# Altium PCB RC.PcbDoc
Units mm, origin at the board's own origin, x right, y up, seen from the top; angles counter-clockwise.
Board outline 106 x 78.9 mm, 4 copper layers (Top Layer, Layer 2, Layer 3, Bottom Layer), stack 0.603 mm thick; 71 components, 62 nets, 320 pads, 0 vias.
Unrouted connection lines stored in the file: 198.
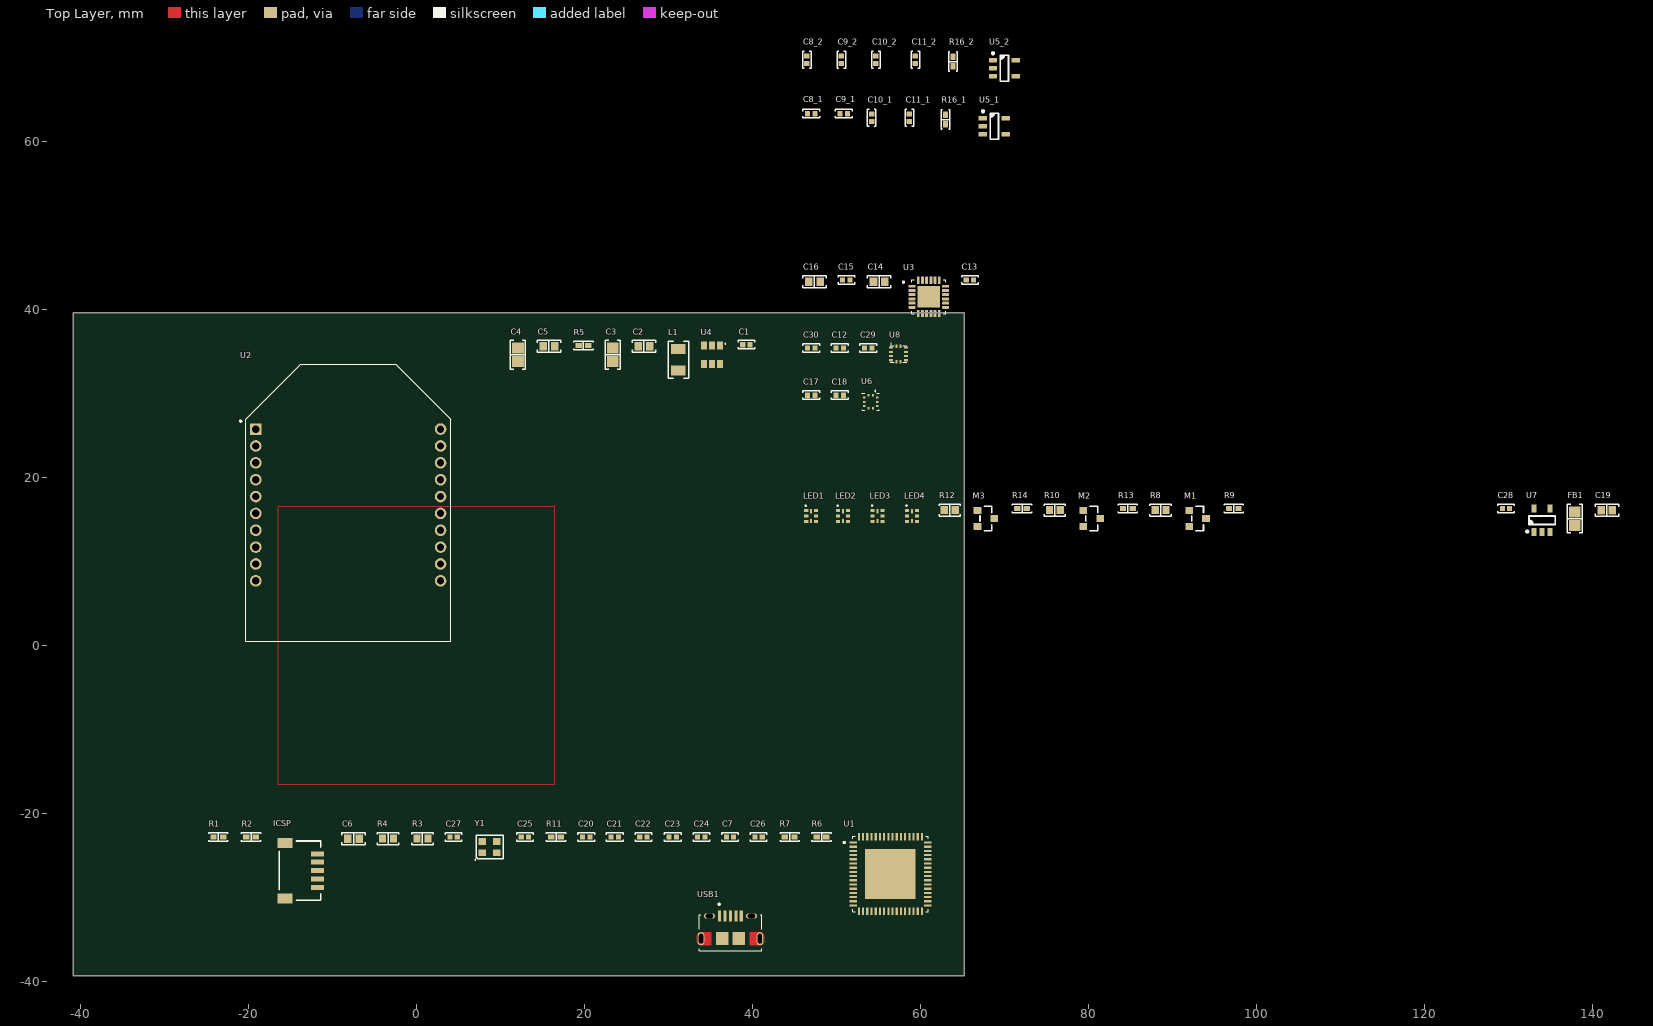
[diagram p0: Top Layer view]
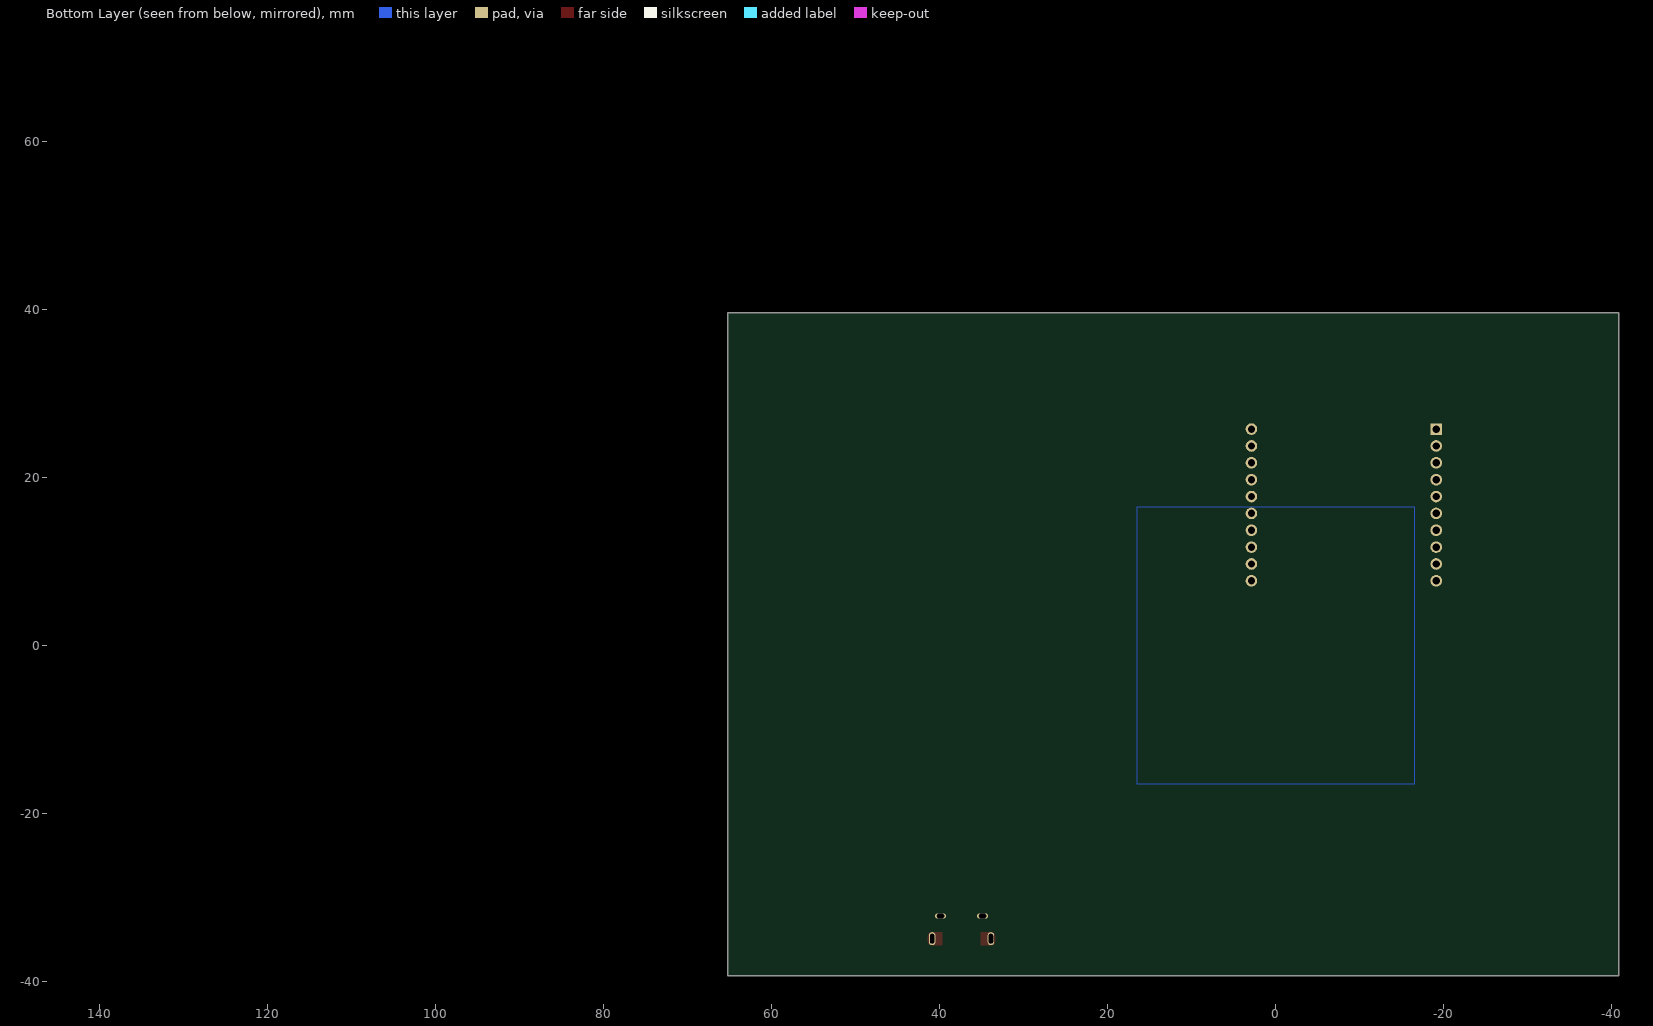
[diagram p1: Bottom Layer view, seen from below]
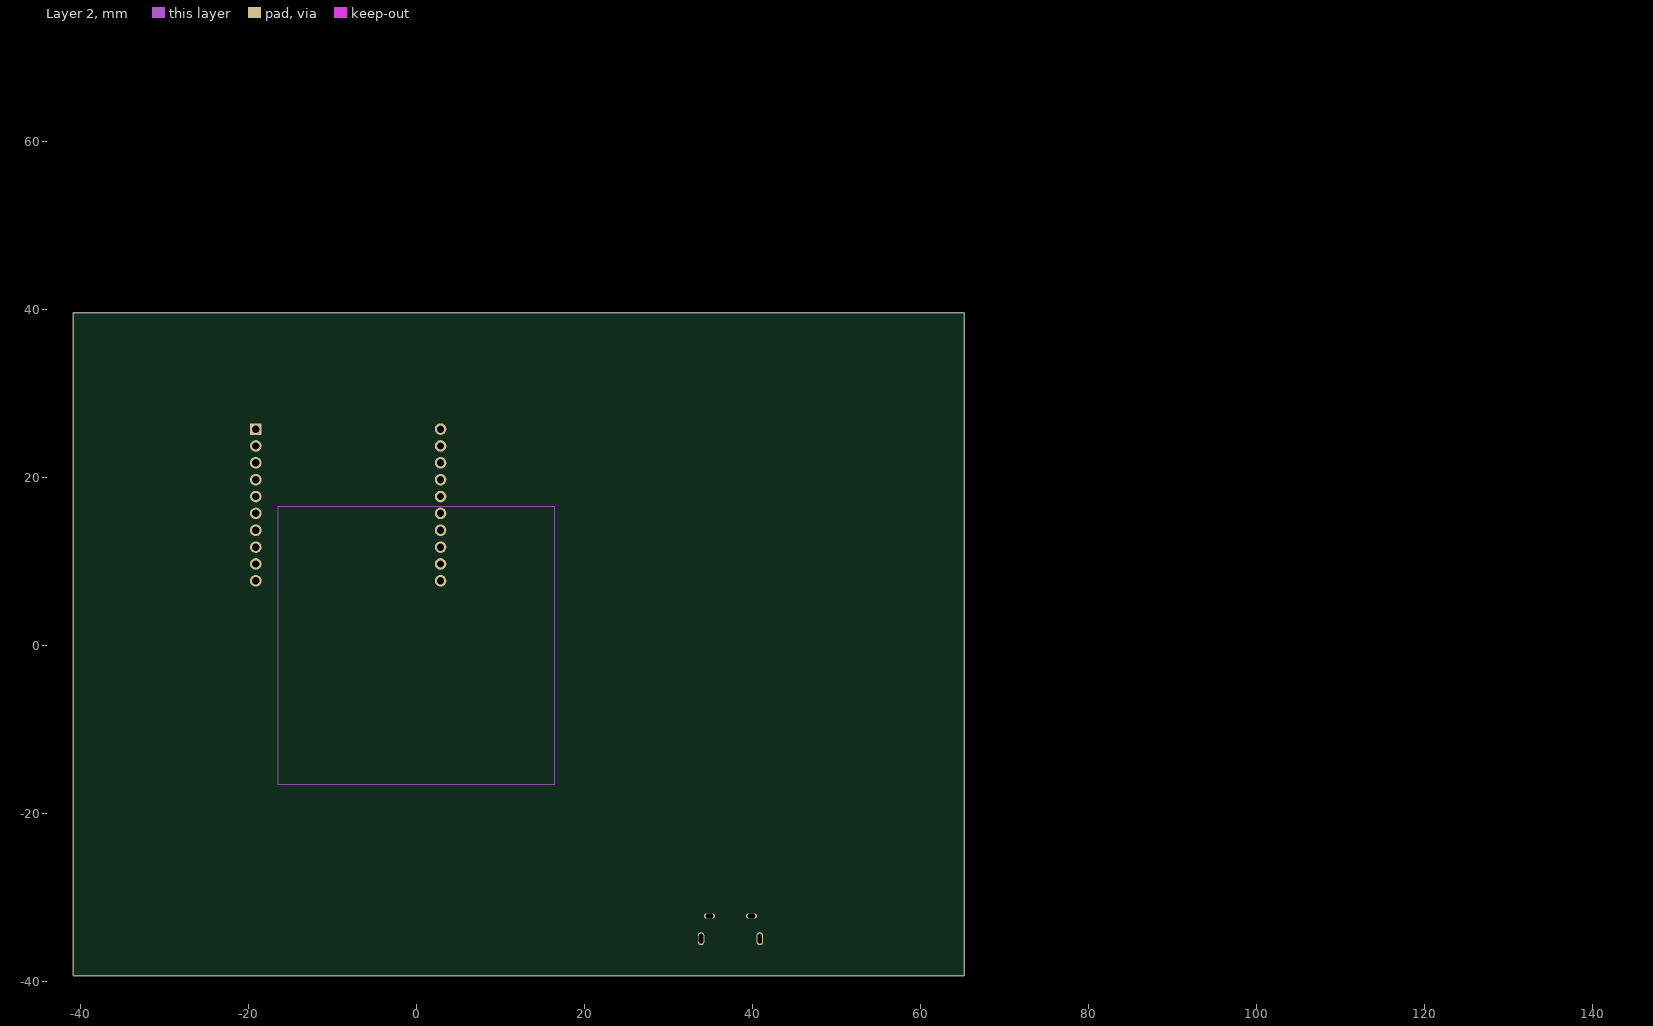
[diagram p2: Layer 2]
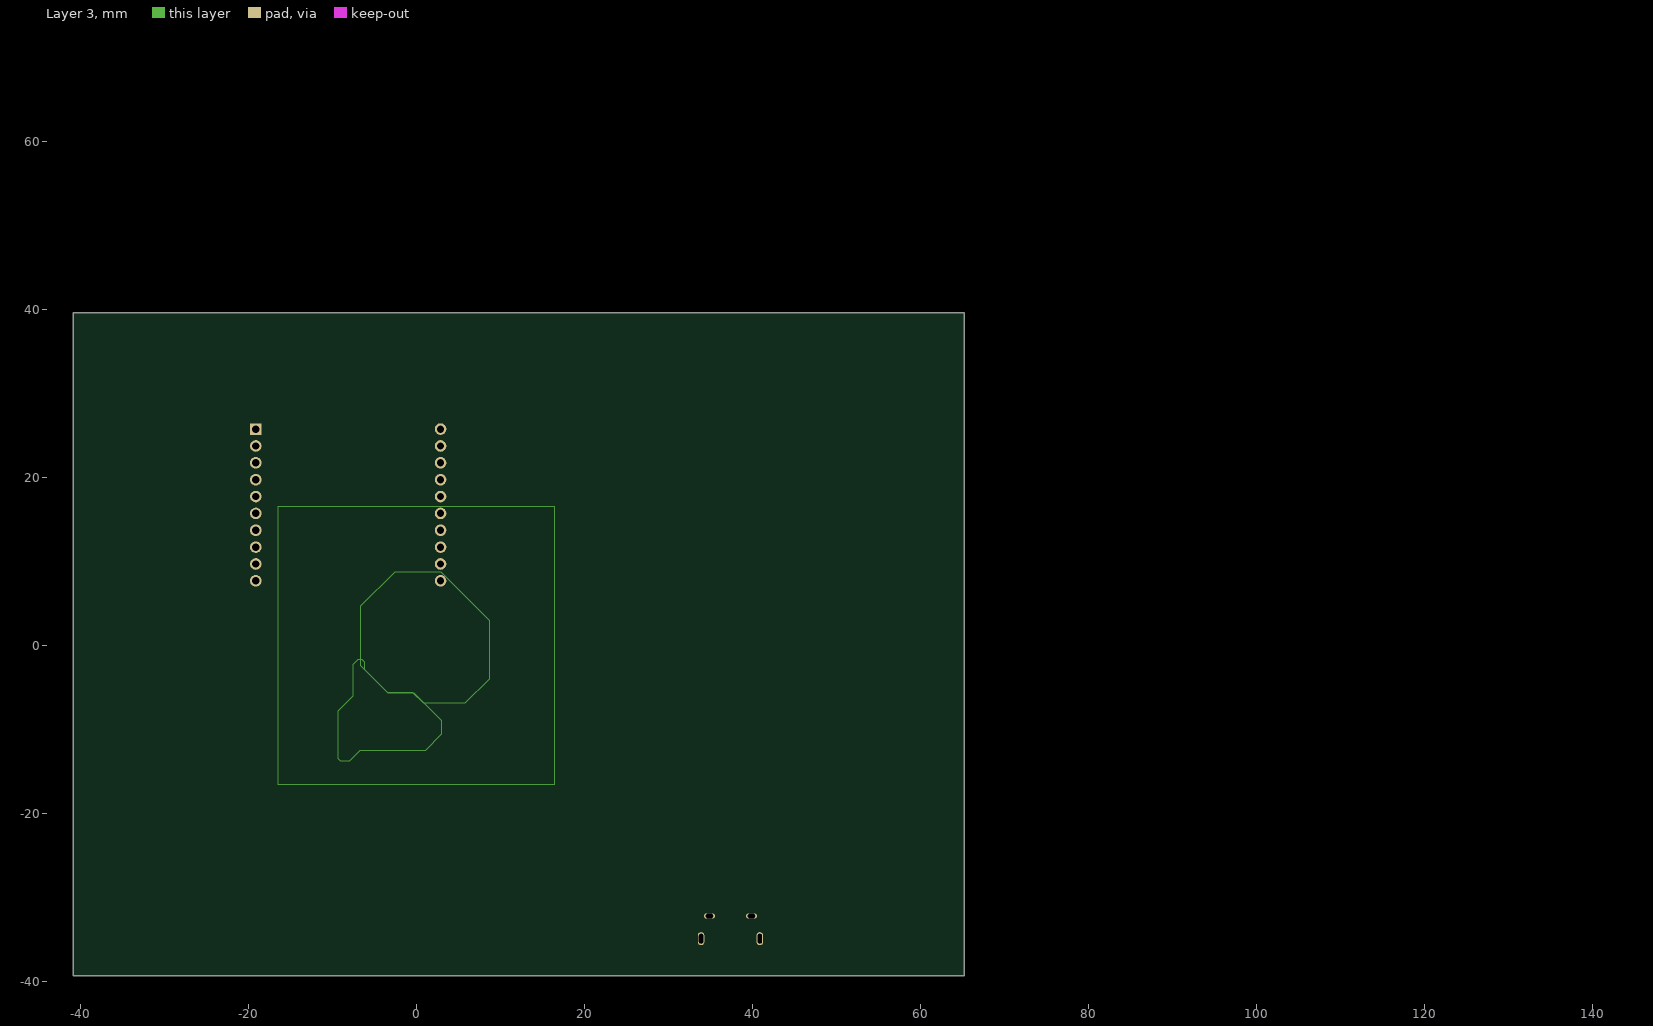
[diagram p3: Layer 3]

## Layer stack, top to bottom
Top Solder: solder mask 0.0102, Solder Resist, Dk 3.5
Top Layer: signal copper 0.0356
Dielectric 2: prepreg 0.0711, PP-006, Dk 4.1
Layer 2: signal copper 0.035
Dielectric 1: dielectric 0.32, FR-4, Dk 4.8
Layer 3: signal copper 0.035
Dielectric 3: prepreg 0.0711, PP-006, Dk 4.1
Bottom Layer: signal copper 0.0356
Bottom Solder: solder mask 0.0102, Solder Resist, Dk 3.5

## Board outline
-40.8,-39.3 -40.8,39.6 65.2,39.6 65.2,-39.3

## Design rules (kind name [scope] priority, off if disabled: settings)
BoardOutlineClearance [All] p1: gap=0.2 ignorepadtopadclearanceinfootprint=FALSE
Clearance "PolyGon Pour Clearance" [InPolygon] p1: gap=0.2 ignorepadtopadclearanceinfootprint=FALSE
Clearance [All] p2: gap=0.2 ignorepadtopadclearanceinfootprint=TRUE except(0: Arc-Hole Track-Hole SMDPad-Hole THPad-Hole Via-Hole Fill-Hole Poly-Hole Region-Hole Text-Hole)
HoleSize [All] p1: absolutevalues=TRUE maxlimit=6.3 minlimit=0.02 maxpercent=80.000 minpercent=20.000
PolygonConnect PolygonRelief [IsPolygon and not (IsNamedPolygon('PolygonDirect'))] p1: thpad.connectstyle=Relief thpad.reliefconductorwidth=0.254 thpad.reliefentries=4 thpad.polygonreliefangle="90 Angle" thpad.airgapwidth=0.254 smdpad.connectstyle=Relief smdpad.reliefconductorwidth=0.254 smdpad.reliefentries=4 smdpad.polygonreliefangle="90 Angle" smdpad.airgapwidth=0.254 via.connectstyle=Direct via.reliefconductorwidth=0.254 via.reliefentries=4 via.polygonreliefangle="90 Angle" via.airgapwidth=0.254
PolygonConnect [All] p2: connectstyle=Direct reliefconductorwidth=0.254 reliefentries=4 polygonreliefangle="90 Angle" airgapwidth=0.254
RoomDefinition U_PIC32MZ [InComponentClass('U_PIC32MZ')] p1: confinementstyle=ConfineIn formatcopy=TRUE lockcomponents=FALSE outline -25.1,-37.9 75,-37.9 75,-21.8 -25.1,-21.8
RoomDefinition U_MPU6050 [InComponentClass('U_MPU6050')] p2: confinementstyle=ConfineIn formatcopy=TRUE lockcomponents=FALSE outline 45.671,42.271 45.671,44.329 56.829,44.329 67.229,44.329 67.229,42.671 63.755,42.671 63.755,38.744 57.546,38.744 57.546,42.271
RoomDefinition U_LIS3MDL [InComponentClass('U_LIS3MDL')] p3: confinementstyle=ConfineIn formatcopy=TRUE lockcomponents=FALSE outline 45.671,34.571 45.671,36.229 55.919,36.229 55.919,36.254 58.88,36.254 58.88,33.194 55.919,33.194 55.919,34.571
RoomDefinition U_BMP390 [InComponentClass('U_BMP390')] p4: confinementstyle=ConfineIn formatcopy=TRUE lockcomponents=FALSE outline 45.671,28.971 45.671,30.629 52.571,30.629 52.571,30.681 55.629,30.681 55.629,27.471 52.571,27.471 52.571,28.971
RoomDefinition U_5V_buck [InComponentClass('U_5V_buck')] p5: confinementstyle=ConfineIn formatcopy=TRUE lockcomponents=FALSE outline 10.871,32.571 10.871,36.629 28.829,36.629 40.629,36.629 40.629,34.971 37.164,34.971 37.164,32.644 32.779,32.644 32.779,31.468 29.621,31.468 29.621,32.571
RoomDefinition U_3V3_LDO_MCU [InComponentClass('U_3V3_LDO_MCU')] p6: confinementstyle=ConfineIn formatcopy=TRUE lockcomponents=FALSE outline 45.671,68.371 45.671,71.029 60.229,71.029 64.754,71.029 64.754,70.979 72.205,70.979 72.205,66.796 67.794,66.796 67.794,67.971 63.046,67.971 63.046,68.371
RoomDefinition U_3V3_LDO_IMU [InComponentClass('U_3V3_LDO_IMU')] p7: confinementstyle=ConfineIn formatcopy=TRUE lockcomponents=FALSE outline 45.671,62.471 45.671,64.129 53.371,64.129 59.529,64.129 63.854,64.129 63.854,64.079 71.005,64.079 71.005,59.896 66.594,59.896 66.594,61.071 62.146,61.071 62.146,61.471 53.371,61.471 53.371,62.471
RoutingVias [All] p1: holewidth=0.3 width=0.55 viastyle="Through Hole" minholewidth=0.2 minwidth=0.4 maxholewidth=0.7 maxwidth=1.27
SolderMaskExpansion [All] p1: expansion=0.102 istentingtop=FALSE
Width [All] p1: maxlimit=0.712 minlimit=0.127 preferedwidth=0.254
29 further rules are at their usual default settings.

## Classes and differential pairs
component class U_MPU6050: C13 C14 C15 C16 U3
component class U_LIS3MDL: C12 C29 C30 U8
component class U_BMP390: C17 C18 U6
component class U_5V_buck: C1 C2 C3 C4 C5 L1 R5 U4
component class U_PIC32MZ: C6 C7 C20 C21 C22 C23 C24 C25 C26 C27 ICSP R1 R2 R3 R4 R6 R7 R11 U1 USB1 Y1
component class U_3V3_LDO_MCU: C8_2 C9_2 C10_2 C11_2 R16_2 U5_2
component class U_3V3_LDO_IMU: C8_1 C9_1 C10_1 C11_1 R16_1 U5_1
channel class 3V3_LDO: U_3V3_LDO_IMU U_3V3_LDO_MCU

## Components (designator, comment, footprint, x,y, rotation, side; value= is the part's Value field where it differs from the comment)
C1 "1 µF" "CAP 0402_1005" 39.3,35.8 r0 top
C2 "1µF" "CAP 0603_1608" 27.1,35.6 r0 top
C3 "22µF" "CAP 0805_2012" 23.4,34.6 r90 top
C4 "22µF" "CAP 0805_2012" 12.1,34.6 r90 top
C5 "0.1µF" "CAP 0603_1608" 15.8,35.6 r0 top
C6 "0.01µF" "CAP 0603_1608" -7.46,-23 r0 top
C7 "0.1 µF" "CAP 0402_1005" 37.34,-22.8 r0 top
C8_1 "1 µF" "CAP 0402_1005" 47,63.3 r0 top (schematic designator C8)
C8_2 "1 µF" "CAP 0402_1005" 46.5,69.7 r90 top (schematic designator C8)
C9_1 "0.1 µF" "CAP 0402_1005" 50.9,63.3 r0 top (schematic designator C9)
C9_2 "0.1 µF" "CAP 0402_1005" 50.6,69.7 r90 top (schematic designator C9)
C10_1 "0.1 µF" "CAP 0402_1005" 54.2,62.8 r90 top (schematic designator C10)
C10_2 "0.1 µF" "CAP 0402_1005" 54.7,69.7 r90 top (schematic designator C10)
C11_1 "1 µF" "CAP 0402_1005" 58.7,62.8 r90 top (schematic designator C11)
C11_2 "1 µF" "CAP 0402_1005" 59.4,69.7 r90 top (schematic designator C11)
C12 "1 µF" "CAP 0402_1005" 50.4,35.4 r0 top
C13 "0.1 µF" "CAP 0402_1005" 65.9,43.5 r0 top
C14 "0.01µF" "CAP 0603_1608" 55.1,43.3 r0 top
C15 "0.1 µF" "CAP 0402_1005" 51.2,43.5 r0 top
C16 "2200pF" "CAP 0603_1608" 47.4,43.3 r0 top
C17 "0.1 µF" "CAP 0402_1005" 47,29.8 r0 top
C18 "0.1 µF" "CAP 0402_1005" 50.4,29.8 r0 top
C19 "0.1µF" "CAP 0603_1608" 141.7,16.1 r0 top
C20 "0.1 µF" "CAP 0402_1005" 20.24,-22.8 r0 top
C21 "0.1 µF" "CAP 0402_1005" 23.64,-22.8 r0 top
C22 "0.1 µF" "CAP 0402_1005" 27.04,-22.8 r0 top
C23 "0.1 µF" "CAP 0402_1005" 30.54,-22.8 r0 top
C24 "0.1 µF" "CAP 0402_1005" 33.94,-22.8 r0 top
C25 "0.1 µF" "CAP 0402_1005" 12.94,-22.8 r0 top
C26 "0.1 µF" "CAP 0402_1005" 40.74,-22.8 r0 top
C27 "0.1 µF" "CAP 0402_1005" 4.44,-22.8 r0 top
C28 "0.1 µF" "CAP 0402_1005" 129.7,16.3 r0 top
C29 "0.1 µF" "CAP 0402_1005" 53.8,35.4 r0 top
C30 "0.1 µF" "CAP 0402_1005" 47,35.4 r0 top
FB1 "=Value" "FER 0805_2012" 137.9,15.1 r90 top
ICSP "SM05B-SRSS-TB(LF)(SN)" "JST SM05B-SRSS-TB" -13.76,-26.8 r90 top
L1 "4.7µH" "IND 1008_2520" 31.2,34 r90 top
LED1 "APA 102 2020" LED_APA-102-2020-256-8 47,15.4 r0 top
LED2 "APA 102 2020" LED_APA-102-2020-256-8 50.8,15.4 r0 top
LED3 "APA 102 2020" LED_APA-102-2020-256-8 54.9,15.4 r0 top
LED4 "APA 102 2020" LED_APA-102-2020-256-8 59,15.4 r0 top
M1 "BSS123-7-F" "DIODES SOT-23-3" 93,15.1 r0 top
M2 "BSS123-7-F" "DIODES SOT-23-3" 80.4,15.1 r0 top
M3 "BSS123-7-F" "DIODES SOT-23-3" 67.8,15.1 r0 top
R1 "4.7k Ohms" "RES 0402_1005" -23.56,-22.8 r0 top
R2 "4.7k Ohms" "RES 0402_1005" -19.66,-22.8 r0 top
R3 "10k" "RES 0603_1608" 0.74,-23 r0 top
R4 "2k" "RES 0603_1608" -3.36,-23 r0 top
R5 "10 kOhms" "RES 0402_1005" 19.9,35.7 r0 top
R6 "33 Ohms" "RES 0402_1005" 48.24,-22.8 r0 top
R7 "33 Ohms" "RES 0402_1005" 44.44,-22.8 r0 top
R8 "330 Ohms" "RES 0603_1608" 88.6,16.1 r0 top
R9 "1k Ohms" "RES 0402_1005" 97.3,16.3 r0 top
R10 "330 Ohms" "RES 0603_1608" 76,16.1 r0 top
R11 "10k Ohms" "RES 0402_1005" 16.64,-22.8 r0 top
R12 "330 Ohms" "RES 0603_1608" 63.5,16.1 r0 top
R13 "1k Ohms" "RES 0402_1005" 84.7,16.3 r0 top
R14 "1k Ohms" "RES 0402_1005" 72.1,16.3 r0 top
R16_1 "10k Ohms" "RES 0402_1005" 63,62.6 r90 top (schematic designator R16)
R16_2 "10k Ohms" "RES 0402_1005" 63.9,69.5 r90 top (schematic designator R16)
U1 "PIC32MZ0512EFE064" QFN50P900X900X100-65N 56.44,-27.2 r0 top
U2 "XBee" XBee -8.1,17 r0 top
U3 "MPU6050" IC_MPU6050 61,41.5 r0 top
U4 "5V Buck" "TSOT-26-6 - 3.2mm" 35.2,34.6 r0 top
U5_1 "MIC5504" "TI SOT-23-5 DBV" 68.8,61.8 r0 top (schematic designator U5)
U5_2 "MIC5504" "TI SOT-23-5 DBV" 70,68.7 r0 top (schematic designator U5)
U6 "BMP390" BMP390L 54.1,29 r0 top
U7 "24LC00" SOT-23-5 134,14.9 r0 top
U8 "LIS3MDL" LGA12_ST 57.4,34.7 r0 top
USB1 "Mirco USB port" AMPHENOL_10118194-0001LF 37.4,-34.9 r0 top
Y1 "27MHz" "ABRACON ASD" 8.74,-24 r0 top

## Footprints (in the part's own frame and the unit in brackets; to place one, negate y for a bottom-side part, rotate by r counter-clockwise, add the part's x,y. Pads: shape width x height; smd on the part's side, far side on the other; paste and mask are expansions set on the pad)
"ABRACON ASD" [mm] "Crystal, 4-Leads, Body 2.00x2.45mm, Pitch 1.65mm, IPC Medium Density"
  rect 0.9x0.8 smd: 1(-0.865,-0.665) 2(0.865,-0.665) 3(0.865,0.665) 4(-0.865,0.665)
  silkscreen extent -1.75,-1.55 1.6,1.4, body extent -1.27,-1.02 1.28,1.03, height 1
AMPHENOL_10118194-0001LF [mm]
  rect 0.4x1.35 smd: 1(-1.3,2.7) 2(-0.65,2.7) 3(0,2.7) 4(0.65,2.7) 5(1.3,2.7)
  oval 1.3x0.65 hole 0.55 slot 0.85 at 0 deg: S1(-2.5,2.7) S2(2.5,2.7)
  oval 0.775x1.55 hole 0.5 slot 1.15 at 90 deg: S3(-3.5,0) S6(3.5,0)
  rect 1.5x1.55 smd: S4(-1,0) S5(1,0)
  Top Layer region: 193 vertices and 0 holes, not listed, extent 2.3,-0.78 4,0.775
  Top Layer region: 193 vertices and 0 holes, not listed, extent -4,-0.775 -2.3,0.78
  silkscreen extent -3.7,-1.45 3.7,4.2, body extent -4.02,-2.7 4.03,3.1, height 2.7
BMP390L [mm]
  rect 0.25x0.275 smd: 1(0.25,0.763) 2(-0.25,0.763) 6(-0.25,-0.763) 7(0.25,-0.763)
  rect 0.275x0.25 smd: 3(-0.763,0.5) 4(-0.763,0) 5(-0.763,-0.5) 8(0.763,-0.5) 9(0.763,0) 10(0.763,0.5)
  silkscreen extent -1,-1 1,1.36, body extent -1,-1 1,1, height 0.75
"CAP 0402_1005" [mm] "Chip Capacitor, 2-Leads, Body 1.02x0.51mm, IPC Medium Density"
  rect 0.6x0.64 smd: 1(-0.44,0) 2(0.44,0)
  silkscreen extent -1,-0.5 1,0.5, body extent -0.5,-0.26 0.5,0.26, height 0.52
"CAP 0603_1608" [mm] "Chip Capacitor, 2-Leads, Body 1.60x0.80mm, IPC Medium Density"
  rect 0.9x1 smd: 1(-0.675,0) 2(0.675,0)
  silkscreen extent -1.4,-0.7 1.4,0.7, body extent -0.8,-0.41 0.8,0.41, height 0.82
"CAP 0805_2012" [mm] "Chip Capacitor, 2-Leads, Body 2.00x1.20mm, IPC Medium Density"
  rect 1.3x1.4 smd: 1(-0.8,0) 2(0.8,0)
  silkscreen extent -1.7,-0.9 1.7,0.9, body extent -1,-0.64 1,0.64, height 1.26
"DIODES SOT-23-3" [mm] "SOT23, 3-Leads, Body 2.90x2.40mm, Pitch 0.95mm, IPC Medium Density"
  rect 0.9x0.8 smd: 1(-1,0.95) 2(-1,-0.95) 3(1,0)
  silkscreen extent -0.7,-1.45 0.7,1.45, body extent -1.41,-1.45 1.41,1.45, height 1.5
"FER 0805_2012" [mm] "Chip Ferrite, 2-Leads, Body 2.00x1.20mm, IPC Medium Density"
  rect 1.3x1.4 smd: 1(-0.8,0) 2(0.8,0)
  silkscreen extent -1.7,-0.9 1.7,0.9, body extent -1,-0.64 1,0.64, height 1.26
IC_MPU6050 [mm]
  rrect25% 0.8x0.35 smd: 1(-2,1.25) 2(-2,0.75) 3(-2,0.25) 4(-2,-0.25) 5(-2,-0.75) 6(-2,-1.25) 13(2,-1.25) 14(2,-0.75) 15(2,-0.25) 16(2,0.25) 17(2,0.75) 18(2,1.25)
  rrect25% 0.35x0.85 smd: 7(-1.25,-1.975) 8(-0.75,-1.975) 9(-0.25,-1.975) 10(0.25,-1.975) 11(0.75,-1.975) 12(1.25,-1.975) 19(1.25,1.975) 20(0.75,1.975) 21(0.25,1.975) 22(-0.25,1.975) 23(-0.75,1.975) 24(-1.25,1.975)
  rect 2.7x2.6 smd paste-2: 25(0,0)
  silkscreen extent -3.1,-2 2,2, body extent -2,-2 2,2, height 0.93
"IND 1008_2520" [mm] "Chip Inductance, 2-leads, Body 2.5x2.1mm, IPC Medium Density"
  rect 1.2x1.75 smd: 1(-1.275,0) 2(1.275,0)
  silkscreen extent -2.18,-1.22 2.2,1.22, body extent -1.3,-1.05 1.3,1.05, height 1
"JST SM05B-SRSS-TB" [mm] "1.0mm pitch/Disconnectable Crimp style connector"
  rect 0.6x1.55 smd: 1(-2,-2.032) 2(-1,-2.032) 3(0,-2.032) 4(1,-2.032) 5(2,-2.032)
  rect 1.2x1.8 smd: M(-3.3,1.843) M(3.3,1.843)
  silkscreen extent -3.53,-2.41 3.53,2.54, body extent -3.5,-2.38 3.5,2.57, height 2.95
LED_APA-102-2020-256-8 [mm]
  rect 0.5x0.37 smd: 1(-0.585,0.64) 2(-0.585,0) 3(-0.585,-0.64) 4(0.585,-0.64) 5(0.585,0) 6(0.585,0.64)
  rect 0.25x0.5 smd: 7(0,-0.575) 8(0,0.575)
  silkscreen extent -0.7,1.2 -0.6,1.3, body extent -1,-1 1,1, height 0.9
LGA12_ST [mm]
  rect 0.45x0.25 smd: 1(-0.9,0.75) 2(-0.9,0.25) 3(-0.9,-0.25) 4(-0.9,-0.75) 7(0.9,-0.75) 8(0.9,-0.25) 9(0.9,0.25) 10(0.9,0.75)
  rect 0.25x0.45 smd: 5(-0.25,-0.925) 6(0.25,-0.925) 11(0.25,0.925) 12(-0.25,0.925)
  silkscreen extent -1,-1 1,1.25, body extent -1,-1 1,1, height 0.25
QFN50P900X900X100-65N [mm]
  rect 0.86x0.26 smd: 1(-4.435,3.75) 2(-4.435,3.25) 3(-4.435,2.75) 4(-4.435,2.25) 5(-4.435,1.75) 6(-4.435,1.25) 7(-4.435,0.75) 8(-4.435,0.25) 9(-4.435,-0.25) 10(-4.435,-0.75) 11(-4.435,-1.25) 12(-4.435,-1.75) 13(-4.435,-2.25) 14(-4.435,-2.75) 15(-4.435,-3.25) 16(-4.435,-3.75) 33(4.435,-3.75) 34(4.435,-3.25) 35(4.435,-2.75) 36(4.435,-2.25) 37(4.435,-1.75) 38(4.435,-1.25) 39(4.435,-0.75) 40(4.435,-0.25) 41(4.435,0.25) 42(4.435,0.75) 43(4.435,1.25) 44(4.435,1.75) 45(4.435,2.25) 46(4.435,2.75) 47(4.435,3.25) 48(4.435,3.75)
  rect 0.26x0.86 smd: 17(-3.75,-4.435) 18(-3.25,-4.435) 19(-2.75,-4.435) 20(-2.25,-4.435) 21(-1.75,-4.435) 22(-1.25,-4.435) 23(-0.75,-4.435) 24(-0.25,-4.435) 25(0.25,-4.435) 26(0.75,-4.435) 27(1.25,-4.435) 28(1.75,-4.435) 29(2.25,-4.435) 30(2.75,-4.435) 31(3.25,-4.435) 32(3.75,-4.435) 49(3.75,4.435) 50(3.25,4.435) 51(2.75,4.435) 52(2.25,4.435) 53(1.75,4.435) 54(1.25,4.435) 55(0.75,4.435) 56(0.25,4.435) 57(-0.25,4.435) 58(-0.75,4.435) 59(-1.25,4.435) 60(-1.75,4.435) 61(-2.25,4.435) 62(-2.75,4.435) 63(-3.25,4.435) 64(-3.75,4.435)
  rect 6x6 smd: 65(0,0)
  silkscreen extent -5.59,-4.5 4.5,4.5, body extent -4.52,-4.52 4.52,4.52, height 0.9
"RES 0402_1005" [mm] "Chip Resistor, 2-Leads, Body 1.0x0.5mm, IPC Medium Density"
  rect 0.75x0.6 smd: 1(-0.575,0) 2(0.575,0)
  silkscreen extent -1.14,-0.51 1.14,0.51, body extent -0.5,-0.25 0.5,0.25, height 0.35
"RES 0603_1608" [mm] "Chip Resistor, 2-Leads, Body 1.60x0.80mm, IPC Medium Density"
  rect 0.85x0.95 smd: 1(-0.65,0) 2(0.65,0)
  silkscreen extent -1.27,-0.7 1.27,0.7, body extent -0.8,-0.4 0.8,0.4, height 0.45
SOT-23-5 [mm]
  rect 0.6x1 smd: 1(-0.95,-1.4) 2(0,-1.4) 3(0.95,-1.4) 4(0.95,1.4) 5(-0.95,1.4)
  silkscreen extent -1.9,-1.47 1.55,0.5, body extent -1.48,-1.44 1.43,1.39, height 1.5
"TI SOT-23-5 DBV" [mm] "SOT23, 5-Leads, Body 2.90x2.80mm, Pitch 0.95mm, IPC Medium Density"
  rect 1x0.55 smd: 1(-1.35,0.95) 2(-1.35,0) 3(-1.35,-0.95) 4(1.35,-0.95) 5(1.35,0.95)
  silkscreen extent -1.47,-1.55 0.5,1.9, body extent -1.44,-1.43 1.39,1.48, height 1.5
"TSOT-26-6 - 3.2mm" [mm]
  rect 0.7x1 smd: 1(0.95,1.1) 2(0,1.1) 3(-0.95,1.1) 4(-0.95,-1.1) 5(0,-1.1) 6(0.95,-1.1)
  silkscreen extent 1.55,1.25 1.66,1.35, body extent -1.45,-1.2 1.45,1.2, height 1
XBee [mil]
  rect 54.25x54.25 hole 34.25: 1(-433,344.5)
  round 54.25 hole 34.25: 2(-433,265.5) 3(-433,186.5) 4(-433,107.5) 5(-433,28.5) 6(-433,-50.5) 7(-433,-129.5) 8(-433,-208.5) 9(-433,-287.5) 10(-433,-366.5) 11(433,-366.5) 12(433,-287.5) 13(433,-208.5) 14(433,-129.5) 15(433,-50.5) 16(433,28.5) 17(433,107.5) 18(433,186.5) 19(433,265.5) 20(433,344.5)
  silkscreen extent -508,-648 480,648, body extent -482,-441 480,646, height 370

## Part data
C1 C8_1 C8_2 C11_1 C11_2 C12: library part C0402C104K4RACAUTO, "CAP CER 0.1UF 16V X7R 0402", Capacitance="0.1 µF", Device Package="0402 (1005 Metric)", Manufacturer=KEMET, Operating Temperature="-55°C ~ 125°C", Ratings=AEC-Q200, Supplier Part Number 1=399-6828-1-ND, Temperature Coefficient=X7R, Tolerance=±10%, Voltage - Rated=16V, Applications="Automotive, Bypass, Decoupling", ComponentLink1Description=Datasheet, ComponentLink1URL=https://api.kemet.com/component-edge/download/specsheet/C0402C104K4RACAUTO.pdf, ComponentLink2Description="DigiKey Link", ComponentLink2URL=https://www.digikey.com/en/products/detail/kemet/C0402C104K4RACAUTO/3314827, LastUpdated="8/14/2022 9:05:51 PM", Lifecycle Status=Active, Minimum Order=1, Mounting Type="Surface Mount, MLCC", Package / Case="0402 (1005 Metric)", Packaging=TapeAndReel, Part Number=C0402C104K4RACAUTO, Part Status=Active, PartId=3024, Price=0.01, Series="SMD Auto X7R", Size / Dimension="0.039\" L x 0.020\" W (1.00mm x 0.50mm)", Supplier 1=DigiKey, Thickness (Max)="0.022\" (0.55mm)"
C2: library part GCJ188R71E105KA01D, "CAP CER 1UF 25V X7R 0603", Device Package="0603 (1608 Metric)", Manufacturer="Murata Electronics", Operating Temperature="-55°C ~ 125°C", Ratings=AEC-Q200, Supplier Part Number 1=490-14409-1-ND, Temperature Coefficient=X7R, Tolerance=±10%, Applications="Automotive, Boardflex Sensitive", Capacitance=1µF, ComponentLink1Description=Datasheet, ComponentLink1URL=https://search.murata.co.jp/Ceramy/image/img/A01X/G101/ENG/GCJ188R71E105KA01-01.pdf, ComponentLink2Description="DigiKey Link", ComponentLink2URL=http://digikey.com/product-detail/en/murata-electronics/GCJ188R71E105KA01D/490-14409-1-ND/6606870, Features="Soft Termination", LastUpdated="13-Aug-20 10:24:06 AM", Lifecycle Status=Active, Minimum Order=1, Mounting Type="Surface Mount, MLCC", Package / Case="0603 (1608 Metric)", Packaging=TapeAndReel, Part Number=GCJ188R71E105KA01D, Part Status=Active, PartId=9566, Price=0.05, Series=GCJ, Size / Dimension="0.063\" L x 0.031\" W (1.60mm x 0.80mm)", Supplier 1=DigiKey, Thickness (Max)="0.035\" (0.90mm)"
C3: library part CL21A226MOQNNNE, "CAP CER 22UF 16V X5R 0805", Device Package="0805 (2012 Metric)", Manufacturer="Samsung Electro-Mechanics", Operating Temperature="-55°C ~ 85°C", Supplier Part Number 1=1276-2909-1-ND, Temperature Coefficient=X5R, Tolerance=±20%, Voltage - Rated=16V, Applications="General Purpose", Capacitance=22µF, ComponentLink1Description=Datasheet, ComponentLink1URL=http://www.samsungsem.com/kr/support/product-search/mlcc/CL21A226MOQNNNE.jsp, ComponentLink2Description="DigiKey Link", ComponentLink2URL=http://digikey.com/product-detail/en/samsung-electro-mechanics/CL21A226MOQNNNE/1276-2909-1-ND/3890995, LastUpdated="21-Jan-20 12:03:05 AM", Lifecycle Status=Active, Minimum Order=1, Mounting Type="Surface Mount, MLCC", Package / Case="0805 (2012 Metric)", Packaging=TapeAndReel, Part Number=CL21A226MOQNNNE, Part Status=Active, PartId=3052, Price=0.11, Series=CL, Size / Dimension="0.079\" L x 0.049\" W (2.00mm x 1.25mm)", Supplier 1=DigiKey, Thickness (Max)="0.055\" (1.40mm)"
C4: library part C2012X7S1E106K125AC, "CAP CER 10UF 25V X7S 0805", Capacitance=10µF, Device Package="0805 (2012 Metric)", Manufacturer="TDK Corporation", Operating Temperature="-55°C ~ 125°C", Supplier Part Number 1=445-181600-1-ND, Temperature Coefficient=X7S, Tolerance=±10%, Voltage - Rated=25V, Applications="General Purpose", ComponentLink1Description=Datasheet, ComponentLink1URL=https://product.tdk.com/en/search/capacitor/ceramic/mlcc/info?part_no=C2012X7S1E106K125AC?ref_disty=digikey, ComponentLink2Description="DigiKey Link", ComponentLink2URL=http://digikey.com/product-detail/en/tdk-corporation/C2012X7S1E106K125AC/445-181600-1-ND/9991478, Features="Low ESL", LastUpdated="21-Jan-20 12:03:04 AM", Lifecycle Status=Active, Minimum Order=1, Mounting Type="Surface Mount, MLCC", Package / Case="0805 (2012 Metric)", Packaging=TapeAndReel, Part Number=C2012X7S1E106K125AC, Part Status=Active, PartId=3339, Price=0.15, Series=C, Size / Dimension="0.079\" L x 0.049\" W (2.00mm x 1.25mm)", Supplier 1=DigiKey, Thickness (Max)="0.057\" (1.45mm)"
C5: library part GCG188R92A104KA03D, "CAP CER 0.1UF 100V 0603 EPOXY", Device Package="0603 (1608 Metric)", Manufacturer="Murata Electronics", Operating Temperature="-55°C ~ 150°C", Ratings=AEC-Q200, Supplier Part Number 1=490-18197-1-ND, Temperature Coefficient=X8R, Tolerance=±10%, Voltage - Rated=100V, Applications=Automotive, Capacitance=0.1µF, ComponentLink1Description=Datasheet, ComponentLink1URL=https://search.murata.co.jp/Ceramy/image/img/A01X/G101/ENG/GCG188R92A104KA03-01.pdf, ComponentLink2Description="DigiKey Link", ComponentLink2URL=http://digikey.com/product-detail/en/murata-electronics/GCG188R92A104KA03D/490-18197-1-ND/9867926, Features="Epoxy Mountable", LastUpdated="21-Jan-20 12:01:59 AM", Lifecycle Status=Active, Minimum Order=1, Mounting Type="Surface Mount, MLCC, Epoxy", Package / Case="0603 (1608 Metric)", Packaging=TapeAndReel, Part Number=GCG188R92A104KA03D, Part Status=Active, PartId=9025, Price=0.07, Series=GCG, Size / Dimension="0.063\" L x 0.031\" W (1.60mm x 0.80mm)", Supplier 1=DigiKey, Thickness (Max)="0.035\" (0.90mm)"
C6: library part GCG188R92A104KA03D, "CAP CER 0.1UF 100V 0603 EPOXY", Capacitance=0.1µF, Device Package="0603 (1608 Metric)", Manufacturer="Murata Electronics", Operating Temperature="-55°C ~ 150°C", Ratings=AEC-Q200, Supplier Part Number 1=490-18197-1-ND, Temperature Coefficient=X8R, Tolerance=±10%, Voltage - Rated=100V, Applications=Automotive, ComponentLink1Description=Datasheet, ComponentLink1URL=https://search.murata.co.jp/Ceramy/image/img/A01X/G101/ENG/GCG188R92A104KA03-01.pdf, ComponentLink2Description="DigiKey Link", ComponentLink2URL=http://digikey.com/product-detail/en/murata-electronics/GCG188R92A104KA03D/490-18197-1-ND/9867926, Features="Epoxy Mountable", LastUpdated="21-Jan-20 12:01:59 AM", Lifecycle Status=Active, Minimum Order=1, Mounting Type="Surface Mount, MLCC, Epoxy", Package / Case="0603 (1608 Metric)", Packaging=TapeAndReel, Part Number=GCG188R92A104KA03D, Part Status=Active, PartId=9025, Price=0.07, Series=GCG, Size / Dimension="0.063\" L x 0.031\" W (1.60mm x 0.80mm)", Supplier 1=DigiKey, Thickness (Max)="0.035\" (0.90mm)"
C7 C9_1 C9_2 C10_1 C10_2 C13 C15 C17 C18 C20 C21 C22 C23 C24 C25 C26 C27 C28 C29 C30: library part C0402C104K4RACAUTO, "CAP CER 0.1UF 16V X7R 0402", Device Package="0402 (1005 Metric)", Manufacturer=KEMET, Operating Temperature="-55°C ~ 125°C", Ratings=AEC-Q200, Supplier Part Number 1=399-6828-1-ND, Temperature Coefficient=X7R, Tolerance=±10%, Voltage - Rated=16V, Applications="Automotive, Bypass, Decoupling", Capacitance="0.1 µF", ComponentLink1Description=Datasheet, ComponentLink1URL=https://api.kemet.com/component-edge/download/specsheet/C0402C104K4RACAUTO.pdf, ComponentLink2Description="DigiKey Link", ComponentLink2URL=https://www.digikey.com/en/products/detail/kemet/C0402C104K4RACAUTO/3314827, LastUpdated="8/14/2022 9:05:51 PM", Lifecycle Status=Active, Minimum Order=1, Mounting Type="Surface Mount, MLCC", Package / Case="0402 (1005 Metric)", Packaging=TapeAndReel, Part Number=C0402C104K4RACAUTO, Part Status=Active, PartId=3024, Price=0.01, Series="SMD Auto X7R", Size / Dimension="0.039\" L x 0.020\" W (1.00mm x 0.50mm)", Supplier 1=DigiKey, Thickness (Max)="0.022\" (0.55mm)"
C14: library part C0603C103KARACAUTO, "CAP CER 0.01UF 250V X7R 0603", Device Package="0603 (1608 Metric)", Manufacturer=KEMET, Operating Temperature="-55°C ~ 125°C", Ratings=AEC-Q200, Supplier Part Number 1=399-17960-1-ND, Temperature Coefficient=X7R, Tolerance=±10%, Applications="Automotive, Bypass, Decoupling", Capacitance=0.01µF, ComponentLink1Description=Datasheet, ComponentLink1URL=https://api.kemet.com/component-edge/download/datasheet/C0603C103KARACAUTO.pdf, ComponentLink2Description="DigiKey Link", ComponentLink2URL=http://digikey.com/product-detail/en/kemet/C0603C103KARACAUTO/399-17960-1-ND/9084030, LastUpdated="13-Aug-20 10:21:06 AM", Lifecycle Status=Active, Minimum Order=1, Mounting Type="Surface Mount, MLCC", Package / Case="0603 (1608 Metric)", Packaging=TapeAndReel, Part Number=C0603C103KARACAUTO, Part Status=Active, PartId=15195, Price=0.25, Series="SMD Auto X7R", Size / Dimension="0.063\" L x 0.031\" W (1.60mm x 0.80mm)", Supplier 1=DigiKey, Thickness (Max)="0.034\" (0.87mm)"
C16: library part CGA3E2X8R1H222M080AD, "CAP CER 2200PF 50V 0603 EPOXY", Device Package="0603 (1608 Metric)", Manufacturer="TDK Corporation", Operating Temperature="-55°C ~ 150°C", Ratings=AEC-Q200, Supplier Part Number 1=445-9890-1-ND, Temperature Coefficient=X8R, Tolerance=±20%, Applications=Automotive, Capacitance=2200pF, ComponentLink1Description=Datasheet, ComponentLink1URL=https://product.tdk.com/info/en/catalog/datasheets/mlcc_automotive_epoxy_en.pdf?ref_disty=digikey, ComponentLink2Description="DigiKey Link", ComponentLink2URL=http://digikey.com/product-detail/en/tdk-corporation/CGA3E2X8R1H222M080AD/445-9890-1-ND/3931817, Features="Epoxy Mountable", LastUpdated="13-Aug-20 10:19:25 AM", Lifecycle Status=Active, Minimum Order=1, Mounting Type="Surface Mount, MLCC, Epoxy", Package / Case="0603 (1608 Metric)", Packaging=TapeAndReel, Part Number=CGA3E2X8R1H222M080AD, Part Status=Active, PartId=17643, Price=0.05, Series=CGA, Size / Dimension="0.063\" L x 0.031\" W (1.60mm x 0.80mm)", Supplier 1=DigiKey, Thickness (Max)="0.031\" (0.80mm)"
C19: library part LD035C104JAB2A, "CAP CER 0.1UF 50V X7R 0603", Device Package="0603 (1608 Metric)", Manufacturer="AVX Corporation", Operating Temperature="-55°C ~ 125°C", Supplier Part Number 1=478-13106-1-ND, Temperature Coefficient=X7R, Tolerance=±5%, Voltage - Rated=50V, Applications="General Purpose", Capacitance=0.1µF, ComponentLink1Description=Datasheet, ComponentLink1URL=http://datasheets.avx.com/LD-Series.pdf, ComponentLink2Description="DigiKey Link", ComponentLink2URL=http://digikey.com/product-detail/en/avx-corporation/LD035C104JAB2A/478-13106-1-ND/9948622, LastUpdated="9/2/2020 1:03:21 AM", Lifecycle Status=Active, Minimum Order=1, Mounting Type="Surface Mount, MLCC", Package / Case="0603 (1608 Metric)", Packaging=TapeAndReel, Part Number=LD035C104JAB2A, Part Status=Active, PartId=10760, Price=0.23, Series=LD, Size / Dimension="0.063\" L x 0.032\" W (1.60mm x 0.81mm)", Supplier 1=DigiKey, Thickness (Max)="0.035\" (0.90mm)"
FB1: library part 2508051017Y0, "FERRITE BEAD 0805 1LN", Current Rating (Max)=300mA, DC Resistance (DCR) (Max)=200mOhm, Device Package="0805 (2012 Metric)", Manufacturer="Fair-Rite Products Corp.", Operating Temperature="-55°C ~ 125°C", Supplier Part Number 1=1934-1435-1-ND, ComponentLink1Description=Datasheet, ComponentLink1URL=http://www.fair-rite.com/wp-content/themes/fair-rite/print_product.php?pid=19091, ComponentLink2Description="DigiKey Link", ComponentLink2URL=http://digikey.com/product-detail/en/fair-rite-products-corp/2508051017Y0/1934-1435-1-ND/8594382, Filter Type="Signal Line", Height (Max)="0.043\" (1.10mm)", LastUpdated="9/2/2020 1:18:22 AM", Lifecycle Status=Active, Minimum Order=1, Mounting Type="Surface Mount", Number of Lines=1, Package / Case="0805 (2012 Metric)", Packaging=TapeAndReel, Part Number=2508051017Y0, Part Status=Active, PartId=1308, Price=0.02, Series=-, Size / Dimension="0.079\" L x 0.049\" W (2.00mm x 1.25mm)", Supplier 1=DigiKey
ICSP: "CONN HEADER SMD R/A 5POS 1MM", Current Rating (Amps)=0.7A, Insulation Color=Natural, Manufacturer="JST Sales America Inc.", Material Flammability Rating="UL94 V-0", Operating Temperature="-25°C ~ 85°C", Supplier Part Number 1=455-1805-1-ND, Voltage Rating=50V, ComponentLink1Description=Datasheet, ComponentLink1URL=http://www.jst-mfg.com/product/pdf/eng/eSH.pdf, ComponentLink2Description="DigiKey Link", ComponentLink2URL=http://digikey.com/product-detail/en/jst-sales-america-inc/SM05B-SRSS-TB-LF-SN/455-1805-1-ND/926876, Connector Type=Header, Contact Finish - Mating=Tin, Contact Finish - Post=Tin, Contact Material="Copper Alloy", Contact Shape=Square, Contact Type="Male Pin", Fastening Type=Push-Pull, Features="Solder Retention", Insulation Height="0.114\" (2.90mm)", Insulation Material="Polyamide (PA), Nylon", LastUpdated="1/12/2020 11:42:04 PM", Lifecycle Status=Active, Minimum Order=1, Mounting Type="Surface Mount, Right Angle", Number of Positions=5, Number of Positions Loaded=All, Number of Rows=1, Packaging=TapeAndReel, Part Number=SM05B-SRSS-TB(LF)(SN), Part Status=Active, PartId=63, Pitch - Mating="0.039\" (1.00mm)", Price=0.32, Series=SR, Shrouding="Shrouded - 4 Wall", Style="Board to Cable/Wire", Supplier 1=DigiKey, Termination=Solder
L1: library part MLP2520S4R7ST0S1, "FIXED IND 4.7UH 1A 110 MOHM SMD", Current Rating (Amps)=1A, DC Resistance (DCR)="143mOhm Max", Device Package="1008 (2520 Metric)", Inductance Frequency - Test=2MHz, Manufacturer="TDK Corporation", Operating Temperature="-40°C ~ 125°C", Supplier Part Number 1=445-6378-1-ND, Tolerance=±20%, ComponentLink1Description=Datasheet, ComponentLink1URL=https://product.tdk.com/info/en/catalog/datasheets/inductor_commercial_power_mlp2520_en.pdf?ref_disty=digikey, ComponentLink2Description="DigiKey Link", ComponentLink2URL=http://digikey.com/product-detail/en/tdk-corporation/MLP2520S4R7ST0S1/445-6378-1-ND/2465705, Height - Seated (Max)="0.039\" (1.00mm)", Inductance=4.7µH, LastUpdated="13-Aug-20 11:03:40 AM", Lifecycle Status=Active, Material - Core=Ferrite, Minimum Order=1, Mounting Type="Surface Mount", Package / Case="1008 (2520 Metric)", Packaging=TapeAndReel, Part Number=MLP2520S4R7ST0S1, Part Status=Active, PartId=3467, Price=0.14, Series=MLP, Shielding=Shielded, Size / Dimension="0.098\" L x 0.079\" W (2.50mm x 2.00mm)", Supplier 1=DigiKey, Supplier Device Package="1008 (2520 Metric)", Type=Multilayer
LED1 LED2 LED3 LED4: library part APA-102-2020-256-8, "8-pin type LED three-color RGB Dimming control", Package="SMD-8 iPixel LED Light Co.", Availability=Unavailable, MF="iPixel LED Light Co.", MP=APA-102-2020-256-8, Price=None, SnapEDA_Link=https://www.snapeda.com/parts/APA-102-2020-256-8/iPixel%20LED%20Light%20Co./view-part/698331/?ref=snap
M1 M2 M3: "MOSFET N-CH 100V 170MA SOT23-3", Current - Continuous Drain (Id) @ 25°C="170mA (Ta)", Drain to Source Voltage (Vdss)=100V, Drive Voltage (Max Rds On,  Min Rds On)=10V, Input Capacitance (Ciss) (Max) @ Vds="60pF @ 25V", Manufacturer="Diodes Incorporated", Operating Temperature="-55°C ~ 150°C (TJ)", Package / Case="TO-236-3, SC-59, SOT-23-3", Power Dissipation (Max)="300mW (Ta)", Supplier Device Package=SOT-23-3, Supplier Part Number 1=BSS123-FDICT-ND, ComponentLink1Description=Datasheet, ComponentLink1URL=https://www.diodes.com/assets/Datasheets/ds30366.pdf, ComponentLink2Description="DigiKey Link", ComponentLink2URL=http://digikey.com/product-detail/en/diodes-incorporated/BSS123-7-F/BSS123-FDICT-ND/717842, FET Type=N-Channel, LastUpdated="8/14/2022 10:06:21 PM", Lifecycle Status=Active, Minimum Order=1, Mounting Type="Surface Mount", Packaging=TapeAndReel, Part Number=BSS123-7-F, Part Status=Active, Price=0.05, Rds On (Max) @ Id, Vgs="6Ohm @ 170mA, 10V", Series=-, Supplier 1=DigiKey, Technology="MOSFET (Metal Oxide)", Vgs (Max)=±20V, Vgs(th) (Max) @ Id="2V @ 1mA"
R1 R2 R6 R7 R9 R11 R13 R14 R16_1 R16_2: library part CRCW0402330RJNEDC, "RES 330 OHM 5% 1/16W 0402", Device Package="0402 (1005 Metric)", Manufacturer="Vishay Dale", Operating Temperature="-55°C ~ 155°C", Power (Watts)="0.063W, 1/16W", Resistance="330 Ohms", Supplier Device Package=0402, Supplier Part Number 1=541-4123-1-ND, Temperature Coefficient=±200ppm/°C, Tolerance=±5%, ComponentLink1Description=Datasheet, ComponentLink1URL=http://www.vishay.com/docs/28773/crcwce3.pdf, ComponentLink2Description="DigiKey Link", ComponentLink2URL=https://www.digikey.com/en/products/detail/vishay-dale/CRCW0402330RJNEDC/7928545, Composition="Thick Film", Height - Seated (Max)="0.014\" (0.35mm)", LastUpdated="8/14/2022 9:23:31 PM", Lifecycle Status=Active, Minimum Order=1, Number of Terminations=2, Package / Case="0402 (1005 Metric)", Packaging=CutTape, Part Number=CRCW0402330RJNEDC, Part Status=Active, PartId=15989, Price=0.01, Series=CRCW-C, Size / Dimension="0.039\" L x 0.020\" W (1.00mm x 0.50mm)", Supplier 1=DigiKey
R3 R4: library part ERJ-3EKF21R5V, "RES SMD 21.5 OHM 1% 1/10W 0603", Device Package="0603 (1608 Metric)", Manufacturer="Panasonic Electronic Components", Operating Temperature="-55°C ~ 155°C", Power (Watts)="0.1W, 1/10W", Ratings=AEC-Q200, Resistance="21.5 Ohms", Supplier Device Package=0603, Supplier Part Number 1=P21.5HCT-ND, Temperature Coefficient=±100ppm/°C, Tolerance=±1%, ComponentLink1Description=Datasheet, ComponentLink1URL=https://industrial.panasonic.com/cdbs/www-data/pdf/RDA0000/AOA0000C304.pdf, ComponentLink2Description="DigiKey Link", ComponentLink2URL=http://digikey.com/product-detail/en/panasonic-electronic-components/ERJ-3EKF21R5V/P21.5HCT-ND/198246, Composition="Thick Film", Features="Automotive AEC-Q200", Height - Seated (Max)="0.022\" (0.55mm)", LastUpdated="21-Jan-20 12:16:19 AM", Lifecycle Status=Active, Minimum Order=1, Number of Terminations=2, Package / Case="0603 (1608 Metric)", Packaging=TapeAndReel, Part Number=ERJ-3EKF21R5V, Part Status=Active, PartId=24202, Price=0.01, Series=ERJ, Size / Dimension="0.063\" L x 0.031\" W (1.60mm x 0.80mm)", Supplier 1=DigiKey
R5: library part RK73H1ETTP1432F, "RES 14.3K OHM 1% 1/10W 0402", Device Package="0402 (1005 Metric)", Manufacturer="KOA Speer Electronics, Inc.", Operating Temperature="-55°C ~ 155°C", Power (Watts)="0.1W, 1/10W", Ratings=AEC-Q200, Resistance="14.3 kOhms", Supplier Device Package=0402, Supplier Part Number 1=2019-RK73H1ETTP1432FCT-ND, Temperature Coefficient=±100ppm/°C, Tolerance=±1%, ComponentLink1Description=Datasheet, ComponentLink1URL=http://www.koaspeer.com/catimages/Products/RK73H/RK73H.pdf, ComponentLink2Description="DigiKey Link", ComponentLink2URL=https://www.digikey.com/en/products/detail/koa-speer-electronics-inc/RK73H1ETTP1432F/9844351, Composition="Thick Film", Features="Automotive AEC-Q200, Moisture Resistant", Height - Seated (Max)="0.016\" (0.40mm)", LastUpdated="8/14/2022 9:23:49 PM", Lifecycle Status=Active, Minimum Order=1, Number of Terminations=2, Package / Case="0402 (1005 Metric)", Packaging=CutTape, Part Number=RK73H1ETTP1432F, Part Status=Active, PartId=10193, Price=0.01, Series=RK73H, Size / Dimension="0.039\" L x 0.020\" W (1.00mm x 0.50mm)", Supplier 1=DigiKey
R8 R10 R12: library part RNCS0603BKE10K0, "RES 10K OHM 0.1% 1/16W 0603", Device Package="0603 (1608 Metric)", Manufacturer="Stackpole Electronics Inc", Operating Temperature="-55°C ~ 155°C", Power (Watts)="0.063W, 1/16W", Ratings=AEC-Q200, Resistance="10 kOhms", Supplier Device Package=0603, Supplier Part Number 1=RNCS0603BKE10K0CT-ND, Temperature Coefficient=±25ppm/°C, Tolerance=±0.1%, ComponentLink1Description=Datasheet, ComponentLink1URL=https://www.seielect.com/catalog/sei-rncs_rnch.pdf, ComponentLink2Description="DigiKey Link", ComponentLink2URL=https://www.digikey.com/en/products/detail/stackpole-electronics-inc/RNCS0603BKE10K0/1708836, Composition="Thin Film", Features="Anti-Corrosive, Automotive AEC-Q200, Moisture Resistant", Height - Seated (Max)="0.022\" (0.55mm)", LastUpdated="8/14/2022 9:31:27 PM", Lifecycle Status=Active, Minimum Order=1, Number of Terminations=2, Package / Case="0603 (1608 Metric)", Packaging=TapeAndReel, Part Number=RNCS0603BKE10K0, Part Status=Active, PartId=4838, Price=0.08, Series=RNCS, Size / Dimension="0.061\" L x 0.031\" W (1.55mm x 0.80mm)", Supplier 1=DigiKey
U1: library part PIC32MZ0512EFE064-I/PT, "32-bit Microcontrollers - MCU 32-BIT MCU 512KB FL 128KB RAM, No Crypto", Package="TQFP-64 Microchip", Availability=Unavailable, MF=Microchip, MP=PIC32MZ2048EFG064T-I/PT, Price=None, SnapEDA_Link=https://www.snapeda.com/parts/PIC32MZ2048EFG064T-I/PT/Microchip/view-part/565997/?ref=snap
U2: "802.15.4 Transceiver Module 2.4GHz Antenna Not Included, U.FL Through Hole"
U4: library part AP63205WU-7, "5V fixed step down Buck"
U5_1 U5_2: library part MIC5504-3.3YM5, "3.3V LDO"
U6: "Altimeter"
U7: "EEPROM"
U8: "Magnetometer"
USB1: library part "USB Micro Horizontal", "USB - micro B USB 2.0 Receptacle Connector 5 Position Through Hole", Package=None, Availability=Unavailable, MF="Amphenol ICC", MP=10118194-0001LF, Price=None, SnapEDA_Link=https://www.snapeda.com/parts/10118194-0001LF/Amphenol%20FCI/view-part/1413308/?ref=snap
Y1: library part ASD3-27.000MHZ-EC-T, "XTAL OSC XO 27.0000MHZ HCMOS SMD", Current - Supply (Max)=4mA, Frequency Stability=±50ppm, Manufacturer="Abracon LLC", Operating Temperature="-20°C ~ 70°C", Package / Case="4-SMD, No Lead", Supplier Part Number 1=535-9608-1-ND, Voltage - Supply=1.8V, Base Resonator=Crystal, ComponentLink1Description=Datasheet, ComponentLink1URL=https://abracon.com/Oscillators/ASDseries.pdf, ComponentLink2Description="DigiKey Link", ComponentLink2URL=http://digikey.com/product-detail/en/abracon-llc/ASD3-27.000MHZ-EC-T/535-9608-1-ND/1237075, Frequency=27MHz, Function=Enable/Disable, Height - Seated (Max)="0.039\" (1.00mm)", LastUpdated="9/14/2022 8:37:45 AM", Lifecycle Status=Active, Minimum Order=1, Mounting Type="Surface Mount", Output=HCMOS, Packaging=TapeAndReel, Part Number=ASD3-27.000MHZ-EC-T, Part Status=Active, PartId=4, Price=1.74, Series=ASD, Size / Dimension="0.098\" L x 0.079\" W (2.50mm x 2.00mm)", Supplier 1=DigiKey, Type="XO (Standard)"

## Nets (pads, with @x,y where several pads share a name; then routed paths per layer and width w, separated by ;. In a path a pad name is that pad's centre, name@x,y a point inside that pad or via, vN(x,y) a via of type N, cw(c..) or ccw(c..) an arc to the next point about the centre after c; other vN are vias at no path point)
3V3: C10_2.2 C11_2.2 C19.1 C28.2 FB1.1 U2.1 U2.14 U5_2.5 U7.5
3V3_IMU: C10_1.2 C11_1.2 C12.1 C13.1 C14.2 C17.2 C18.2 C29.1 U3.8 U3.13 U5_1.5 U6.1 U6.6 U6.10 U8.5 U8.6 U8.10
5V: C1.2 C2.2 C3.2 C8_1.2 C8_2.2 C9_1.2 C9_2.2 L1.2 LED1.1 LED1.8 LED2.1 LED2.8 LED3.1 LED3.8 LED4.1 LED4.8 R16_1.2 R16_2.2 U4.1 U5_1.1 U5_2.1
APA102.CI: LED1.5 U1.4
APA102.DI: LED1.4 U1.6
BMP_INT: U1.52 U6.7
CON_LED_B: R12.2
CON_LED_G: R10.2
CON_LED_R: R8.2
ESC1: U1.21
ESC2: U1.22
ESC3: U1.18
ESC4: U1.17
GATE_LED_B: R14.2 U1.5
GATE_LED_G: R13.2 U1.10
GATE_LED_R: R9.2 U1.23
GND: C2.1 C3.1 C4.1 C5.2 C6.2 C7.1 C8_1.1 C8_2.1 C9_1.1 C9_2.1 C10_1.1 C10_2.1 C11_1.1 C11_2.1 C12.2 C13.2 C14.1 C15.2 C16.2 C17.1 C18.1 C19.2 C20.1 C21.1 C22.1 C23.1 C24.1 C25.2 C26.1 C27.1 C28.1 C29.2 C30.2 ICSP.3 LED1.6 LED1.7 LED2.6 LED2.7 LED3.6 LED3.7 LED4.6 LED4.7 M1.2 M2.2 M3.2 R4.1 U1.7 U1.20 U1.25 U1.35 U1.40 U1.55 U1.59 U1.65 U2.10 U3.1 U3.9 U3.11 U3.18 U3.25 U4.4 U5_1.2 U5_2.2 U6.3 U6.5 U6.8 U6.9 U7.2 U8.2 U8.3 U8.9 U8.12 USB1.5 USB1.S1 USB1.S2 Y1.2
GPS.RX: U1.43
GPS.TX: U1.46
I2C.SCL: R2.1 U1.42 U3.23 U6.2 U7.1 U8.1
I2C.SDA: R1.1 U1.41 U3.24 U6.4 U7.3 U8.11
INT.INT_LIS3: U1.53 U8.8
INT.INT_MPU: U1.51 U3.12
MCLR: C25.1 ICSP.1 R11.1 U1.9
MCU_TO_RF_U4: R6.2 U1.30
MCU_VDD: C7.2 C20.2 C21.2 C22.2 C23.2 C24.2 C26.2 C27.2 FB1.2 ICSP.2 R1.2 R2.2 R11.2 U1.8 U1.19 U1.26 U1.34 U1.39 U1.54 U1.60 Y1.4
NetC1_1: C1.1 U4.6
NetC15_1: C15.1 U3.10
NetC16_1: C16.1 U3.20
NetC30_1: C30.1 U8.4
NetL1_1: L1.1 U4.5
NetLED1_2: LED1.2 LED2.5
NetLED1_3: LED1.3 LED2.4
NetLED2_2: LED2.2 LED3.5
NetLED2_3: LED2.3 LED3.4
NetLED3_2: LED3.2 LED4.5
NetLED3_3: LED3.3 LED4.4
NetM1_1: M1.1 R9.1
NetM1_3: M1.3 R8.1
NetM2_1: M2.1 R13.1
NetM2_3: M2.3 R10.1
NetM3_1: M3.1 R14.1
NetM3_3: M3.3 R12.1
NetR5_2: R5.2 U4.2
NetR16_1_1: R16_1.1 U5_1.3
NetR16_2_1: R16_2.1 U5_2.3
OSC: U1.31 Y1.3
PGC: ICSP.5 U1.15
PGD: ICSP.4 U1.16
RF_DIN: R6.1 U2.3
RF_DOUT: R7.1 U2.2
RF_TO_MCU_U4: R7.2 U1.29
RPM1: U1.13
RPM2: U1.14
RPM3: U1.49
RPM4: U1.50
USB_D+: U1.37 USB1.3
USB_D-: U1.36 USB1.2
USB_ID: U1.38 USB1.4
VBAT: C4.2 C5.1 R3.2 R5.1 U4.3
VBAT_ADC: C6.1 R3.1 R4.2 U1.28
VBUS: U1.33 USB1.1
pads on no net: ICSP.M LED4.2 LED4.3 U1.1 U1.2 U1.3 U1.11 U1.12 U1.24 U1.27 U1.32 U1.44 U1.45 U1.47 U1.48 U1.56 U1.57 U1.58 U1.61 U1.62 U1.63 U1.64 U2.4 U2.5 U2.6 U2.7 U2.8 U2.9 U2.11 U2.12 U2.13 U2.15 U2.16 U2.17 U2.18 U2.19 U2.20 U3.2 U3.3 U3.4 U3.5 U3.6 U3.7 U3.14 U3.15 U3.16 U3.17 U3.19 U3.21 U3.22 U5_1.4 U5_2.4 U7.4 U8.7 USB1.S3 USB1.S4 USB1.S5 USB1.S6 Y1.1

## Polygon pours and split planes (outlines as drawn)
5V on Layer 3 "NONET_L03_P006" (solid, shelved, pour order 6): -16.5,16.5 -16.5,-16.5 16.5,-16.5 16.5,16.5
MCU_VDD on Layer 3 "NONET_L03_P004" (solid, shelved, pour order 4): -6.6,4.7 -2.5,8.8 2.9,8.8 8.7,3 8.7,-4 5.8,-6.9 0.9,-6.9 -0.4,-5.6 -3.4,-5.6 -6.6,-2.4
3V3_IMU on Layer 3 "NONET_L03_P002" (solid, shelved, pour order 2): -9.3,-13.488 -9.3,-7.8 -7.482,-5.982 -7.482,-2.236 -6.875,-1.629 -6.485,-1.629 -6.181,-1.933 -6.181,-2.819 -3.4,-5.6 -0.3,-5.6 3.004,-8.904 3.004,-10.584 1.084,-12.504 -6.716,-12.504 -8,-13.788 -9,-13.788
GND on Bottom Layer "NONET_L04_P000" (solid, shelved, pour order 0): -16.5,16.5 -16.5,-16.5 16.5,-16.5 16.5,16.5
GND on Top Layer "NONET_L01_P001" (solid, shelved, pour order 1): -16.5,16.5 -16.5,-16.5 16.5,-16.5 16.5,16.5
GND on Layer 2 "NONET_L02_P005" (solid, shelved, pour order 5): -16.5,16.5 -16.5,-16.5 16.5,-16.5 16.5,16.5

## Silkscreen, mask and mechanical layers (free items; w line width, h text height)
Board:
  the board outline again, w0.254